# Altium PCB DE-270624.PcbDoc
Units mil, origin at the board's own origin, x right, y up, seen from the top; angles counter-clockwise.
Board outline 4921.26 x 2755.91 mil, 2 copper layers (Top Layer, Bottom Layer); 36 components, 66 nets, 162 pads, 17 vias.
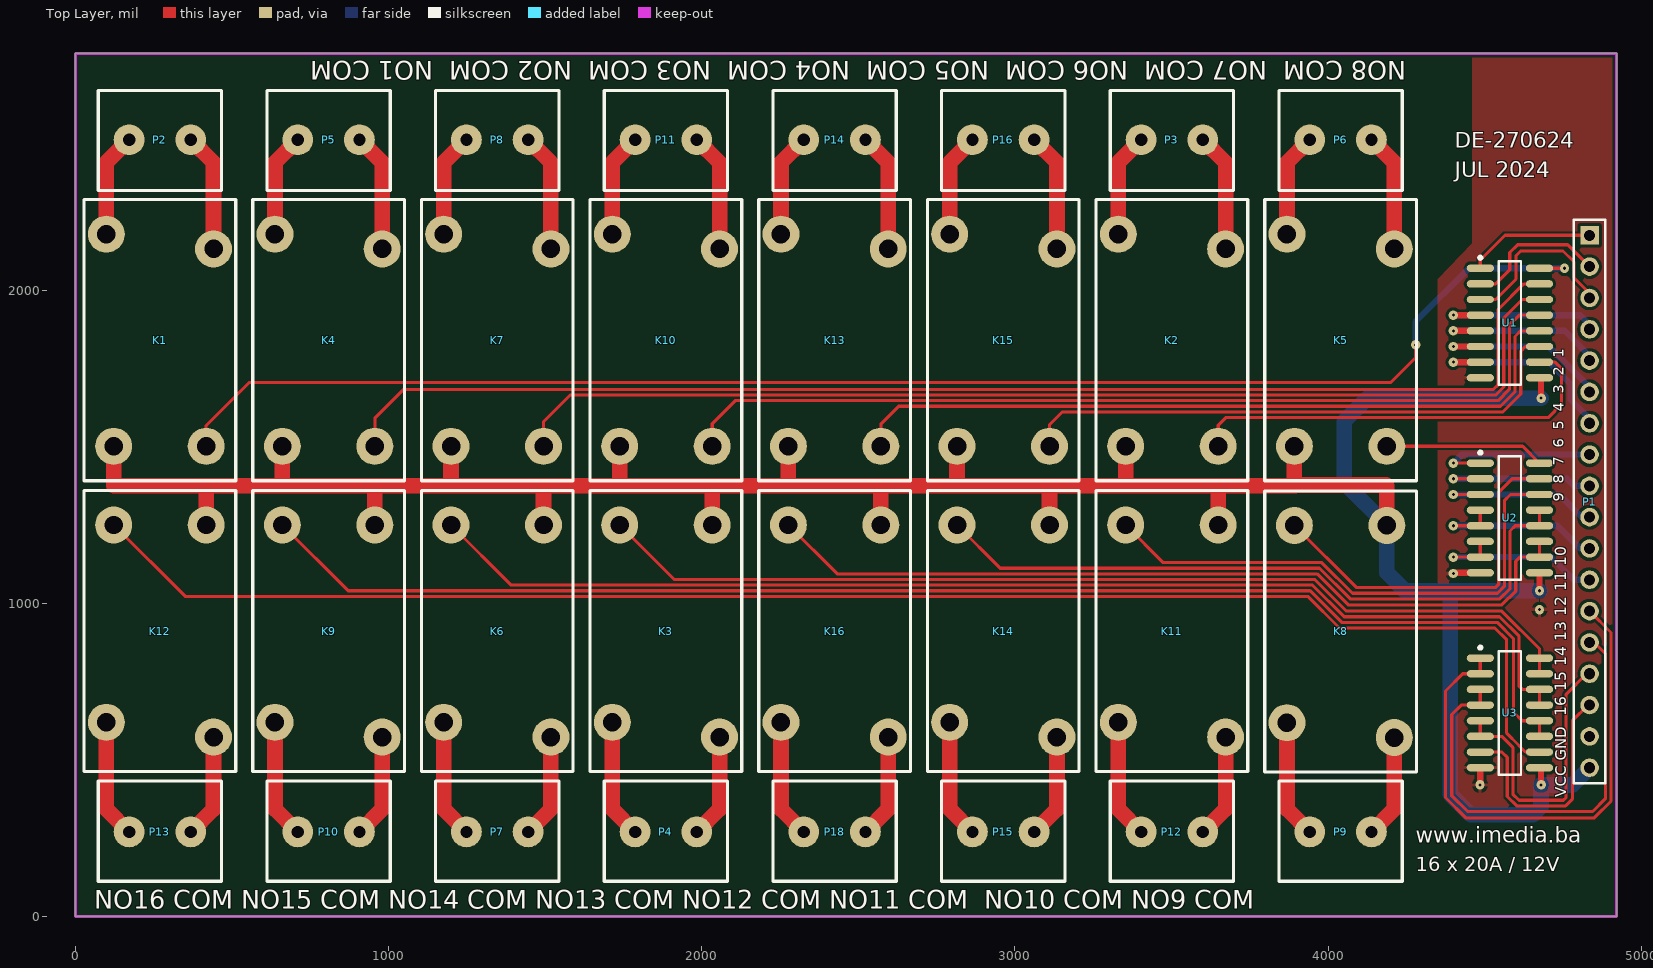
[diagram p0: Top Layer view]
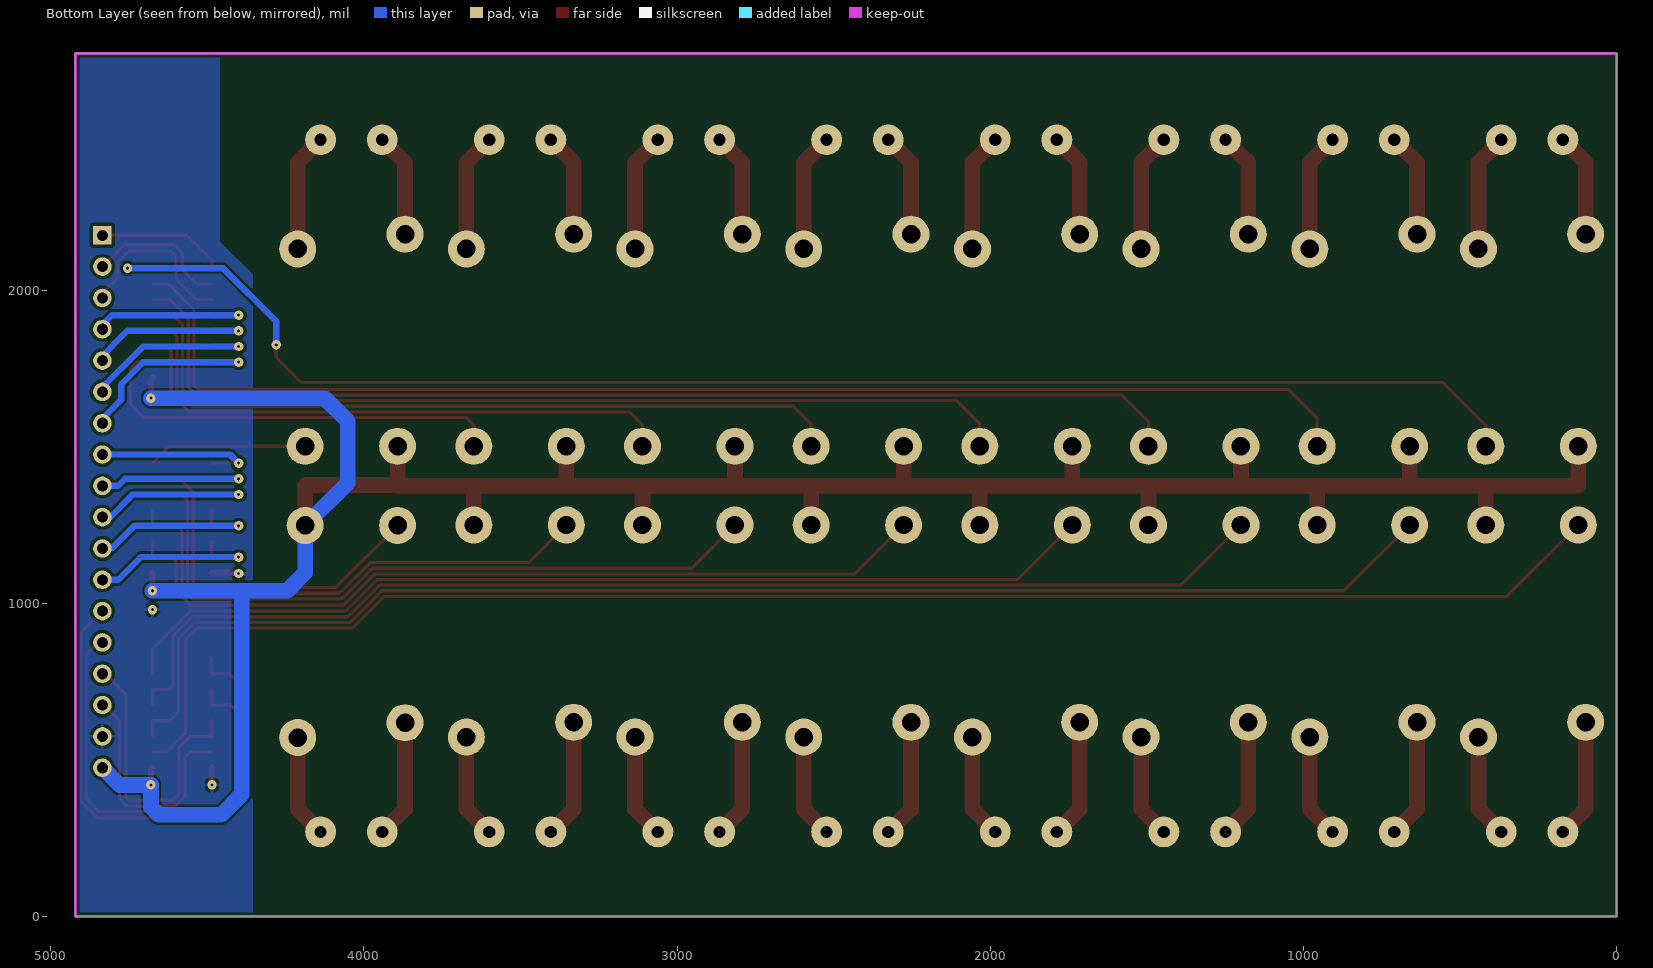
[diagram p1: Bottom Layer view, seen from below]

## Layer stack, top to bottom
Top Solder: solder mask 0.4, Solder Resist, Dk 3.5
Top Layer: signal copper 1.4
Dielectric 1: dielectric 12.6, FR-4, Dk 4.8
Bottom Layer: signal copper 1.4
Bottom Solder: solder mask 0.4, Solder Resist, Dk 3.5

## Board outline
0,0 0,2755.91 4921.26,2755.91 4921.26,0

## Design rules (kind name [scope] priority, off if disabled: settings)
Clearance [All] p1: gap=10 ignorepadtopadclearanceinfootprint=FALSE except(0: Arc-Hole Track-Hole SMDPad-Hole THPad-Hole Via-Hole Fill-Hole Poly-Hole Region-Hole Text-Hole; 8: Arc-Arc Arc-Track Arc-SMDPad Arc-THPad Arc-Via Arc-Fill Arc-Poly Arc-Region Arc-Text Track-Track Track-SMDPad Track-THPad Track-Via Track-Fill Track-Poly Track-Region Track-Text)
PolygonConnect [All] p1: connectstyle=Relief reliefconductorwidth=10 reliefentries=4 polygonreliefangle="90 Angle" airgapwidth=10
RoutingVias [All] p1: holewidth=28 width=50 viastyle="Through Hole" minholewidth=10 minwidth=30 maxholewidth=28 maxwidth=50
SolderMaskExpansion [All] p1: expansion=4
Width [All] p1: maxlimit=100 minlimit=10 preferedwidth=20
30 further rules are at their usual default settings.

## Components (designator, comment, footprint, x,y, rotation, side; value= is the part's Value field where it differs from the comment)
K1 "HF25F" HF25F 270,1840 r90 top
K2 "HF25F" HF25F 3501.43,1840 r90 top
K3 "HF25F" HF25F 1885.71,911.42 r270 top
K4 "HF25F" HF25F 808.57,1840 r90 top
K5 "HF25F" HF25F 4040,1840 r90 top
K6 "HF25F" HF25F 1347.14,911.42 r270 top
K7 "HF25F" HF25F 1347.14,1840 r90 top
K8 "HF25F" HF25F 4040,910 r270 top
K9 "HF25F" HF25F 808.57,911.42 r270 top
K10 "HF25F" HF25F 1885.71,1840 r90 top
K11 "HF25F" HF25F 3501.43,911.42 r270 top
K12 "HF25F" HF25F 270,911.42 r270 top
K13 "HF25F" HF25F 2424.29,1840 r90 top
K14 "HF25F" HF25F 2962.86,911.42 r270 top
K15 "HF25F" HF25F 2962.86,1840 r90 top
K16 "HF25F" HF25F 2424.29,911.42 r270 top
P1 "Header 18" HDR1X18 4835,2175 r270 top
P2 "220Vac" "TERMINAL BLOK 2 - 3,5mm" 270,2480 r270 top
P3 "220Vac" "TERMINAL BLOK 2 - 3,5mm" 3501.43,2480 r270 top
P4 "220Vac" "TERMINAL BLOK 2 - 3,5mm" 1885.71,270 r90 top
P5 "220Vac" "TERMINAL BLOK 2 - 3,5mm" 808.57,2480 r270 top
P6 "220Vac" "TERMINAL BLOK 2 - 3,5mm" 4040,2480 r270 top
P7 "220Vac" "TERMINAL BLOK 2 - 3,5mm" 1347.14,270 r90 top
P8 "220Vac" "TERMINAL BLOK 2 - 3,5mm" 1347.14,2480 r270 top
P9 "220Vac" "TERMINAL BLOK 2 - 3,5mm" 4040,270 r90 top
P10 "220Vac" "TERMINAL BLOK 2 - 3,5mm" 808.57,270 r90 top
P11 "220Vac" "TERMINAL BLOK 2 - 3,5mm" 1885.71,2480 r270 top
P12 "220Vac" "TERMINAL BLOK 2 - 3,5mm" 3501.43,270 r90 top
P13 "220Vac" "TERMINAL BLOK 2 - 3,5mm" 270,270 r90 top
P14 "220Vac" "TERMINAL BLOK 2 - 3,5mm" 2424.29,2480 r270 top
P15 "220Vac" "TERMINAL BLOK 2 - 3,5mm" 2962.86,270 r90 top
P16 "220Vac" "TERMINAL BLOK 2 - 3,5mm" 2962.86,2480 r270 top
P18 "220Vac" "TERMINAL BLOK 2 - 3,5mm" 2424.29,270 r90 top
U1 "ULN2003D" SO16_N 4580.51,1895 r0 top
U2 "ULN2003D" SO16_N 4580.51,1272.5 r0 top
U3 "ULN2003D" SO16_N 4580.51,650 r0 top

## Footprints (in the part's own frame and the unit in brackets; to place one, negate y for a bottom-side part, rotate by r counter-clockwise, add the part's x,y. Pads: shape width x height; smd on the part's side, far side on the other; paste and mask are expansions set on the pad)
HDR1X18 [mm] "Connector; Header; 18 Position"
  rect 1.5x1.5 hole 0.9: 1(0,0)
  round 1.5 hole 0.9: 2(2.54,0) 3(5.08,0) 4(7.62,0) 5(10.16,0) 6(12.7,0) 7(15.24,0) 8(17.78,0) 9(20.32,0) 10(22.86,0) 11(25.4,0) 12(27.94,0) 13(30.48,0) 14(33.02,0) 15(35.56,0) 16(38.1,0) 17(40.64,0) 18(43.18,0)
  silkscreen extent -1.27,-1.27 44.45,1.27
HF25F [mm] "PCB relay 20A/250VAC 16A/30VDC"
  round 3 hole 1.5: 1(-8.6,3.75) 2(-8.6,-3.75) 3(8.6,4.35) 4(7.4,-4.35)
  silkscreen extent -11.4,-6.15 11.4,6.15, body extent -11.43,-6.1 11.43,6.1, height 25
SO16_N [mm] "SOIC, 16-Leads, Body 9.9x3.9mm, Pitch 1.27mm, IPC Medium Density"
  oval 2.2x0.6 smd: 1(-2.4,4.445) 2(-2.4,3.175) 3(-2.4,1.905) 4(-2.4,0.635) 5(-2.4,-0.635) 6(-2.4,-1.905) 7(-2.4,-3.175) 8(-2.4,-4.445) 9(2.4,-4.445) 10(2.4,-3.175) 11(2.4,-1.905) 12(2.4,-0.635) 13(2.4,0.635) 14(2.4,1.905) 15(2.4,3.175) 16(2.4,4.445)
  silkscreen extent -2.52,-5 0.9,5.42, body extent -1.95,-4.95 1.95,4.95, height 1.75
"TERMINAL BLOK 2 - 3,5mm" [mm] "Terminal blok 3,5mm"
  round 2.5 hole 1: 1(0,-2.5) 2(0,2.5)
  silkscreen extent -4,-5 4.13,5, body extent -4.06,-4.83 4.06,4.83, height 10

## Part data
K1 K2 K3 K4 K5 K6 K7 K8 K9 K10 K11 K12 K13 K14 K15 K16: "PCB relay 250VAC/20A 30VDC/16A"
P1: "Header, 18-Pin"
P2 P3 P4 P5 P6 P7 P8 P9 P10 P11 P12 P13 P14 P15 P16 P18: library part "TERMINAL BLOK 2", "Terminal blok konektor 3,5 mm"
U1 U2 U3: "Seven Darlington Array"

## Via types
v1: diameter 30, hole 10, Top Layer to Bottom Layer, 17 vias

## Nets (pads, with @x,y where several pads share a name; then routed paths per layer and width w, separated by ;. In a path a pad name is that pad's centre, name@x,y a point inside that pad or via, vN(x,y) a via of type N, cw(c..) or ccw(c..) an arc to the next point about the centre after c; other vN are vias at no path point)
NetK1_3: K1.3 P2.1 | length 331.6
  Top Layer w50: K1.3 98.74,2407.17 P2.1
NetK1_4: K1.4 P2.2 | length 378.8
  Top Layer w50: P2.2 441.26,2407.17 K1.4
NetK2_3: K2.3 P3.1 | length 331.6
  Top Layer w50: K2.3 3330.17,2407.17 P3.1
NetK2_4: K2.4 P3.2 | length 378.8
  Top Layer w50: P3.2 3672.69,2407.17 K2.4
NetK3_3: K3.3 P4.1 | length 333
  Top Layer w50: P4.1 2056.97,342.83 K3.3
NetK3_4: K3.4 P4.2 | length 380.2
  Top Layer w50: K3.4 1714.45,342.83 P4.2
NetK4_3: K4.3 P5.1 | length 331.6
  Top Layer w50: K4.3 637.31,2407.17 P5.1
NetK4_4: K4.4 P5.2 | length 378.8
  Top Layer w50: P5.2 979.83,2407.17 K4.4
NetK5_3: K5.3 P6.1 | length 331.6
  Top Layer w50: K5.3 3868.74,2407.17 P6.1
NetK5_4: K5.4 P6.2 | length 378.8
  Top Layer w50: P6.2 4211.26,2407.17 K5.4
NetK6_3: K6.3 P7.1 | length 333
  Top Layer w50: P7.1 1518.4,342.83 K6.3
NetK6_4: K6.4 P7.2 | length 380.2
  Top Layer w50: K6.4 1175.88,342.83 P7.2
NetK7_3: K7.3 P8.1 | length 331.6
  Top Layer w50: K7.3 1175.88,2407.17 P8.1
NetK7_4: K7.4 P8.2 | length 378.8
  Top Layer w50: P8.2 1518.4,2407.17 K7.4
NetK8_3: K8.3 P9.1 | length 331.6
  Top Layer w50: P9.1 4211.26,342.83 K8.3
NetK8_4: K8.4 P9.2 | length 378.8
  Top Layer w50: K8.4 3868.74,342.83 P9.2
NetK9_3: K9.3 P10.1 | length 333
  Top Layer w50: P10.1 979.83,342.83 K9.3
NetK9_4: K9.4 P10.2 | length 380.2
  Top Layer w50: K9.4 637.31,342.83 P10.2
NetK10_3: K10.3 P11.1 | length 331.6
  Top Layer w50: K10.3 1714.45,2407.17 P11.1
NetK10_4: K10.4 P11.2 | length 378.8
  Top Layer w50: P11.2 2056.97,2407.17 K10.4
NetK11_3: K11.3 P12.1 | length 333
  Top Layer w50: P12.1 3672.69,342.83 K11.3
NetK11_4: K11.4 P12.2 | length 380.2
  Top Layer w50: K11.4 3330.17,342.83 P12.2
NetK12_3: K12.3 P13.1 | length 333
  Top Layer w50: P13.1 441.26,342.83 K12.3
NetK12_4: K12.4 P13.2 | length 380.2
  Top Layer w50: K12.4 98.74,342.83 P13.2
NetK13_3: K13.3 P14.1 | length 331.6
  Top Layer w50: K13.3 2253.03,2407.17 P14.1
NetK13_4: K13.4 P14.2 | length 378.8
  Top Layer w50: P14.2 2595.55,2407.17 K13.4
NetK14_3: K14.3 P15.1 | length 333
  Top Layer w50: P15.1 3134.12,342.83 K14.3
NetK14_4: K14.4 P15.2 | length 380.2
  Top Layer w50: K14.4 2791.6,342.83 P15.2
NetK15_3: K15.3 P16.1 | length 331.6
  Top Layer w50: K15.3 2791.6,2407.17 P16.1
NetK15_4: K15.4 P16.2 | length 378.8
  Top Layer w50: P16.2 3134.12,2407.17 K15.4
NetK16_3: K16.3 P18.1 | length 333
  Top Layer w50: P18.1 2595.55,342.83 K16.3
NetK16_4: K16.4 P18.2 | length 380.2
  Top Layer w50: K16.4 2253.03,342.83 P18.2
NetP1_1: P1.1 U1.1 | length 422.7
  Top Layer w10: U1.1 4486.02,2096.02 4565,2175 P1.1 P1.1@4850,2175
NetP1_2: P1.2 U1.2 | length 477
  Top Layer w10: U1.2 4535,2020 4580,2065 4580,2120 4605,2145 4765,2145 P1.2 P1.2@4850,2075
NetP1_3: P1.3 U1.3 | length 563.5
  Top Layer w10: U1.3 4535,1970 4600,2035 4600,2110 4615,2125 4750,2125 4785,2090 4785,2040 P1.3@4850,1975
NetP1_4: P1.4 U1.4 | length 554.7
  Top Layer w20: v1(4400,1920) U1.4
  Bottom Layer w20: v1(4400,1920) 4805,1920 P1.4@4850,1875
NetP1_5: P1.5 U1.5 | length 575.4
  Top Layer w20: v1(4400,1870) U1.5
  Bottom Layer w20: v1(4400,1870) 4755,1870 P1.5@4850,1775
NetP1_6: P1.6 U1.6 | length 596.1
  Top Layer w20: v1(4400,1820) U1.6
  Bottom Layer w20: v1(4400,1820) 4705,1820 P1.6@4850,1675
NetP1_7: P1.7 U1.7 | length 646.1
  Top Layer w20: v1(4400,1770) U1.7
  Bottom Layer w20: v1(4400,1770) 4705,1770 4775,1700 4775,1650 P1.7@4850,1575
NetP1_8: P1.8 U2.1 | length 547.4
  Top Layer w10: v1(4400,1447.5) U2.1
  Bottom Layer w20: v1(4400,1447.5) 4427.5,1475 P1.8 P1.8@4850,1475
NetP1_9: P1.9 U2.2 | length 545.3
  Top Layer w10: v1(4400,1397.5) U2.2
  Bottom Layer w20: v1(4400,1397.5) 4762.5,1397.5 4785,1375 P1.9 P1.9@4850,1375
NetP1_10: P1.10 U2.3 | length 566.1
  Top Layer w10: v1(4400,1347.5) U2.3
  Bottom Layer w20: v1(4400,1347.5) 4737.5,1347.5 4810,1275 P1.10 P1.10@4850,1275
NetP1_11: P1.11 U2.4 U2.5 | length 616.1
  Top Layer w10: v1(4400,1247.5) U2.5 U2.4
  Bottom Layer w20: v1(4400,1247.5) 4732.5,1247.5 4805,1175 P1.11 P1.11@4850,1175
NetP1_12: P1.12 U2.6 U2.7 | length 616.1
  Top Layer w10: v1(4400,1147.5) U2.7 U2.6
  Bottom Layer w20: v1(4400,1147.5) 4712.5,1147.5 4785,1075 P1.12 P1.12@4850,1075
NetP1_13: P1.13 U3.1 U3.2 | length 1736.1
  Top Layer w10: U3.1 U3.2 4430,775 4375,720 4375,380 4440,315 4850,315 4903.26,368.26 4903.26,906.74 P1.13
NetP1_14: P1.14 U3.3 U3.4 | length 1454.9
  Top Layer w10: U3.3 U3.4 4425,675 4395,645 4395,385.46 4445.46,335 4844.54,335 4885.26,375.72 4885.26,839.74 P1.14@4850,875
NetP1_15: P1.15 U3.5 U3.6 | length 946.7
  Top Layer w10: U3.5 U3.6 4555,575 4590,540 4590,390.46 4609.46,371 4751,371 4760,380 4760,710 4825,775 P1.15 P1.15@4850,775
NetP1_16: P1.16 U3.7 | length 788.5
  Top Layer w10: U3.7 4555,525 4572,508 4572,383 4602,353 4758.46,353 4780,374.54 4780,625 4830,675 P1.16 P1.16@4850,675
REL_0: K1.2 U1.16 | length 4759
  Top Layer w10: K1.2 417.64,1567.64 555,1705 4200,1705 4280,1785 v1(4280,1825) ; U1.16 v1(4755,2070)
  Bottom Layer w20: v1(4280,1825) 4280,1900 4450,2070 v1(4755,2070)
REL_1: K4.2 U1.15 | length 4126.8
  Top Layer w10: K4.2 956.21,1591.21 1048,1683 4528,1683 4543,1698 4543,1938 4625,2020 U1.15
REL_2: K7.2 U1.14 | length 3549.4
  Top Layer w10: K7.2 1494.78,1579.78 1580,1665 4535.46,1665 4561,1690.54 4561,1911 4620,1970 U1.14
REL_3: K10.2 U1.13 | length 2977.8
  Top Layer w10: K10.2 2033.35,1573.35 2107,1647 4542.91,1647 4579,1683.09 4579,1889 4610,1920 U1.13
REL_4: K13.2 U1.12 | length 2400.4
  Top Layer w10: K13.2 2571.92,1571.92 2629,1629 4550.37,1629 4597,1675.63 4597,1852 4615,1870 U1.12
REL_5: K15.2 U1.11 | length 1817.1
  Top Layer w10: K15.2 3110.49,1570.49 3151,1611 4557.82,1611 4615,1668.18 4615,1805 4630,1820 U1.11
REL_6: K2.2 U1.10 | length 1384.2
  Top Layer w10: K2.2 3649.07,1569.07 3673,1593 4703,1593 4745,1635 4745,1750 4725,1770 U1.10
REL_7: K5.2 U2.16 | length 509.7
  Top Layer w10: K5.2 4621.08,1501.42 U2.16
REL_8: K8.2 U2.15 | length 1180.8
  Top Layer w10: K8.2 4090.94,1050 4533.63,1050 4545,1061.37 4545,1355 4587.5,1397.5 U2.15
REL_9: K11.2 U2.14 | length 1702.7
  Top Layer w10: K11.2 3473.79,1130 3980,1130 4078,1032 4541.09,1032 4563,1053.91 4563,1328 4582.5,1347.5 U2.14
REL_10: K14.2 U2.12 U2.13 | length 2212.4
  Top Layer w10: K14.2 2953.22,1112 3972.54,1112 4070.54,1014 4548.54,1014 4581,1046.46 4581,1231 4597.5,1247.5 U2.12 U2.13
REL_11: K16.2 U2.10 U2.11 | length 2672.8
  Top Layer w10: K16.2 2432.65,1094 3965.09,1094 4064.09,995 4555,995 4599,1039 4599,1134 4612.5,1147.5 U2.10 U2.11
REL_12: K3.2 U3.15 U3.16 | length 3180.5
  Top Layer w10: K3.2 1912.08,1076 3957.63,1076 4058.63,975 4554.91,975 4675,854.91 U3.16 U3.15
REL_13: K6.2 U3.13 U3.14 | length 3836.4
  Top Layer w10: K6.2 1391.51,1058 3950.18,1058 4051.18,957 4547.46,957 4610,894.46 4610,735 4620,725 U3.14 U3.13
REL_14: K9.2 U3.11 U3.12 | length 4460
  Top Layer w10: K9.2 870.93,1040 3942.72,1040 4043.72,939 4540,939 4592,887 4592,653 4620,625 U3.12 U3.11
REL_15: K12.2 U3.10 | length 5027.8
  Top Layer w10: K12.2 350.36,1022 3935.27,1022 4036.27,921 4532.54,921 4570,883.54 4570,585.46 4608,547.46 4608,547 4630,525 U3.10
VCC: K1.1 K2.1 K3.1 K4.1 K5.1 K6.1 K7.1 K8.1 K9.1 K10.1 K11.1 K12.1 K13.1 K14.1 K15.1 K16.1 P1.18 U1.9 U2.9 U3.9 | length 9232.1
  Top Layer w20: U3.9 4680,470 v1(4680,420) ; v1(4675,1040) U2.9 ; U1.9 4680,1715 v1(4680,1655)
  Top Layer w50: K1.1 122.36,1375 415,1375 ; K12.1 417.64,1372.36 415,1375 ; K4.1 660.93,1375.93 660,1375 ; K9.1 956.21,1371.21 960,1375 ; K7.1 1199.51,1379.51 1195,1375 ; K6.1 1494.78,1364.78 1505,1375 ; K10.1 1738.08,1381.92 1745,1375 ; K3.1 2033.35,1371.65 2030,1375 ; K13.1 2276.65,1381.65 2270,1375 ; K16.1 2571.92,1371.92 2575,1375 ; K15.1 2815.22,1375.22 2815,1375 ; K14.1 3110.49,1374.51 3110,1375 ; K2.1 3353.79,1378.79 3350,1375 ; K11.1 3649.07,1374.07 3650,1375 ; K5.1 3892.36,1377.64 ; K8.1 4187.64,1375 4185,1377.64 3892.36,1377.64 ; 415,1375 660,1375 ; 660,1375 960,1375 ; 960,1375 1195,1375 ; 1195,1375 1505,1375 ; 1505,1375 1745,1375 ; 1745,1375 2030,1375 ; 2030,1375 2270,1375 ; 2270,1375 2575,1375 ; 2575,1375 2815,1375 ; 2815,1375 3110,1375 ; 3110,1375 3350,1375 ; 3350,1375 3650,1375 ; 3650,1375 3895,1375 3892.36,1377.64
  Bottom Layer w50: v1(4675,1040) 4390,1040 ; v1(4680,1655) 4125,1655 4051.22,1581.22 4051.22,1385 K8.1 4187.64,1097.36 4245,1040 4390,1040 ; P1.18 4780,420 v1(4680,420) 4680,350 4655,325 4455,325 4390,390 4390,1035 ; 4390,1035 4390,1040 ; 4390,1035 4395,1035 4390,1040
VSS: P1.17 U1.8 U2.8 U3.8 | length 142.5
  Top Layer w20: v1(4400,1095) 4402.5,1097.5 U2.8 ; v1(4485,420) 4486.02,421.02 U3.8
  other v1: 4675,980

## Polygon pours and split planes (outlines as drawn)
VSS on Top Layer "Bottom Layer-No Net" (solid, remove dead copper, pour order 0): 4460,2750 4460,2150 4350,2035 4350,2030 4350,10 4921.26,10 4921.26,2755.91 4465.91,2755.91
VSS on Bottom Layer "Bottom Layer-No Net" (solid, remove dead copper, pour order 2): 4460,2750 4460,2155 4355,2050 4355,0 4921.26,0 4921.26,2755.91 4460.91,2755.91 4455,2750

## Keep-outs
Keep-Out Layer:
  the board outline again, w10

## Silkscreen, mask and mechanical layers (free items; w line width, h text height)
Top Overlay:
  text "NO8 COM  NO7 COM  NO6 COM  NO5 COM  NO4 COM  NO3 COM  NO2 COM  NO1 COM" at 4250,2730 h60 r180
  text "DE-270624" at 4405,2455 h50
  text "JUL 2024" at 4405,2360 h50
  text "9  8  7  6  5  4  3  2  1" at 4752.68,1324.68 h34 r90
  text "16 15 14 13 12 11 10" at 4760,640 h36 r90
  text "VCC GND" at 4760,380 h35 r90
  text "www.imedia.ba" at 4280,235 h50
  text "16 x 20A / 12V" at 4280,145 h45
  text "NO16 COM NO15 COM NO14 COM NO13 COM NO12 COM NO11 COM  NO10 COM NO9 COM" at 60,25 h60

## Dimensions
4921.26,2755.91 to 4921.26,0 on Mechanical 1
0,2755.91 to 4921.26,2755.91 on Mechanical 1